# Altium PCB DifferentialPair.PCBDOC
Units mil, origin at the board's own origin, x right, y up, seen from the top; angles counter-clockwise.
Board outline 6000 x 4000 mil, 4 copper layers (Component Side, Ground Plane, Power Plane, Solder Side); 6 components, 7 nets, 424 pads, 0 vias.
Unrouted connection lines stored in the file: 101.
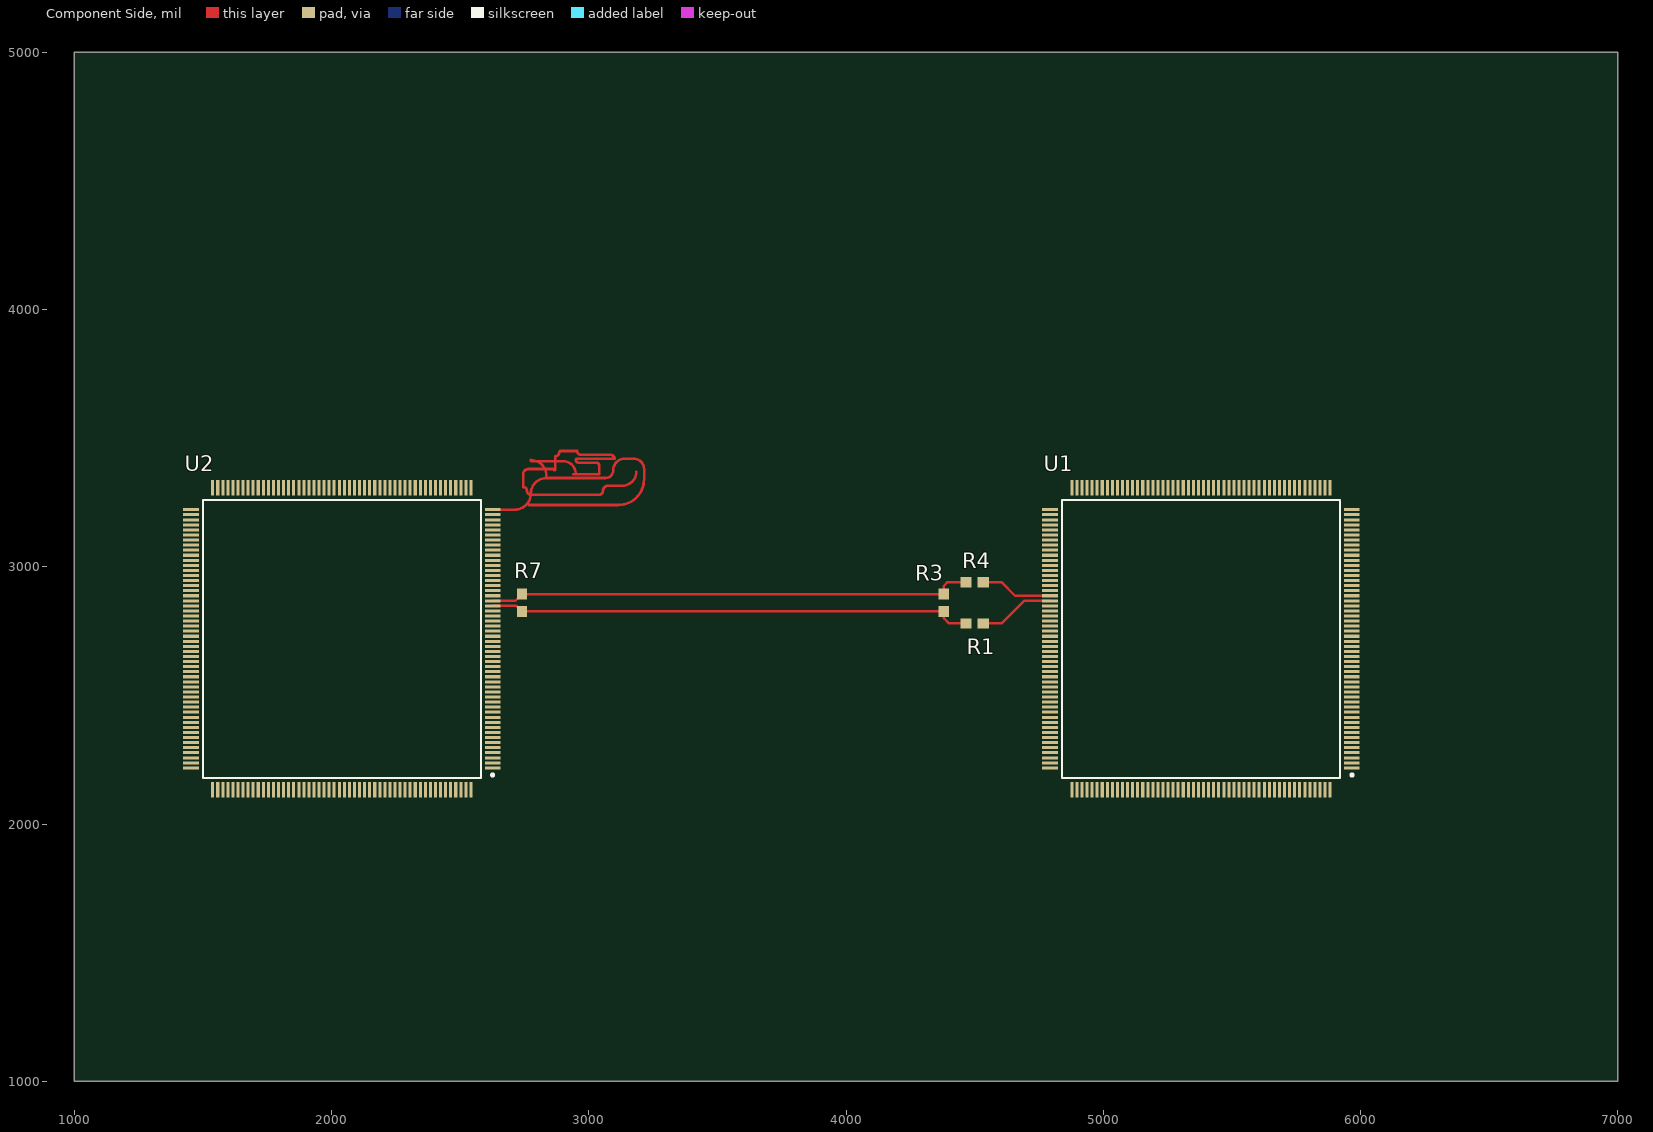
[diagram p0: Component Side view]
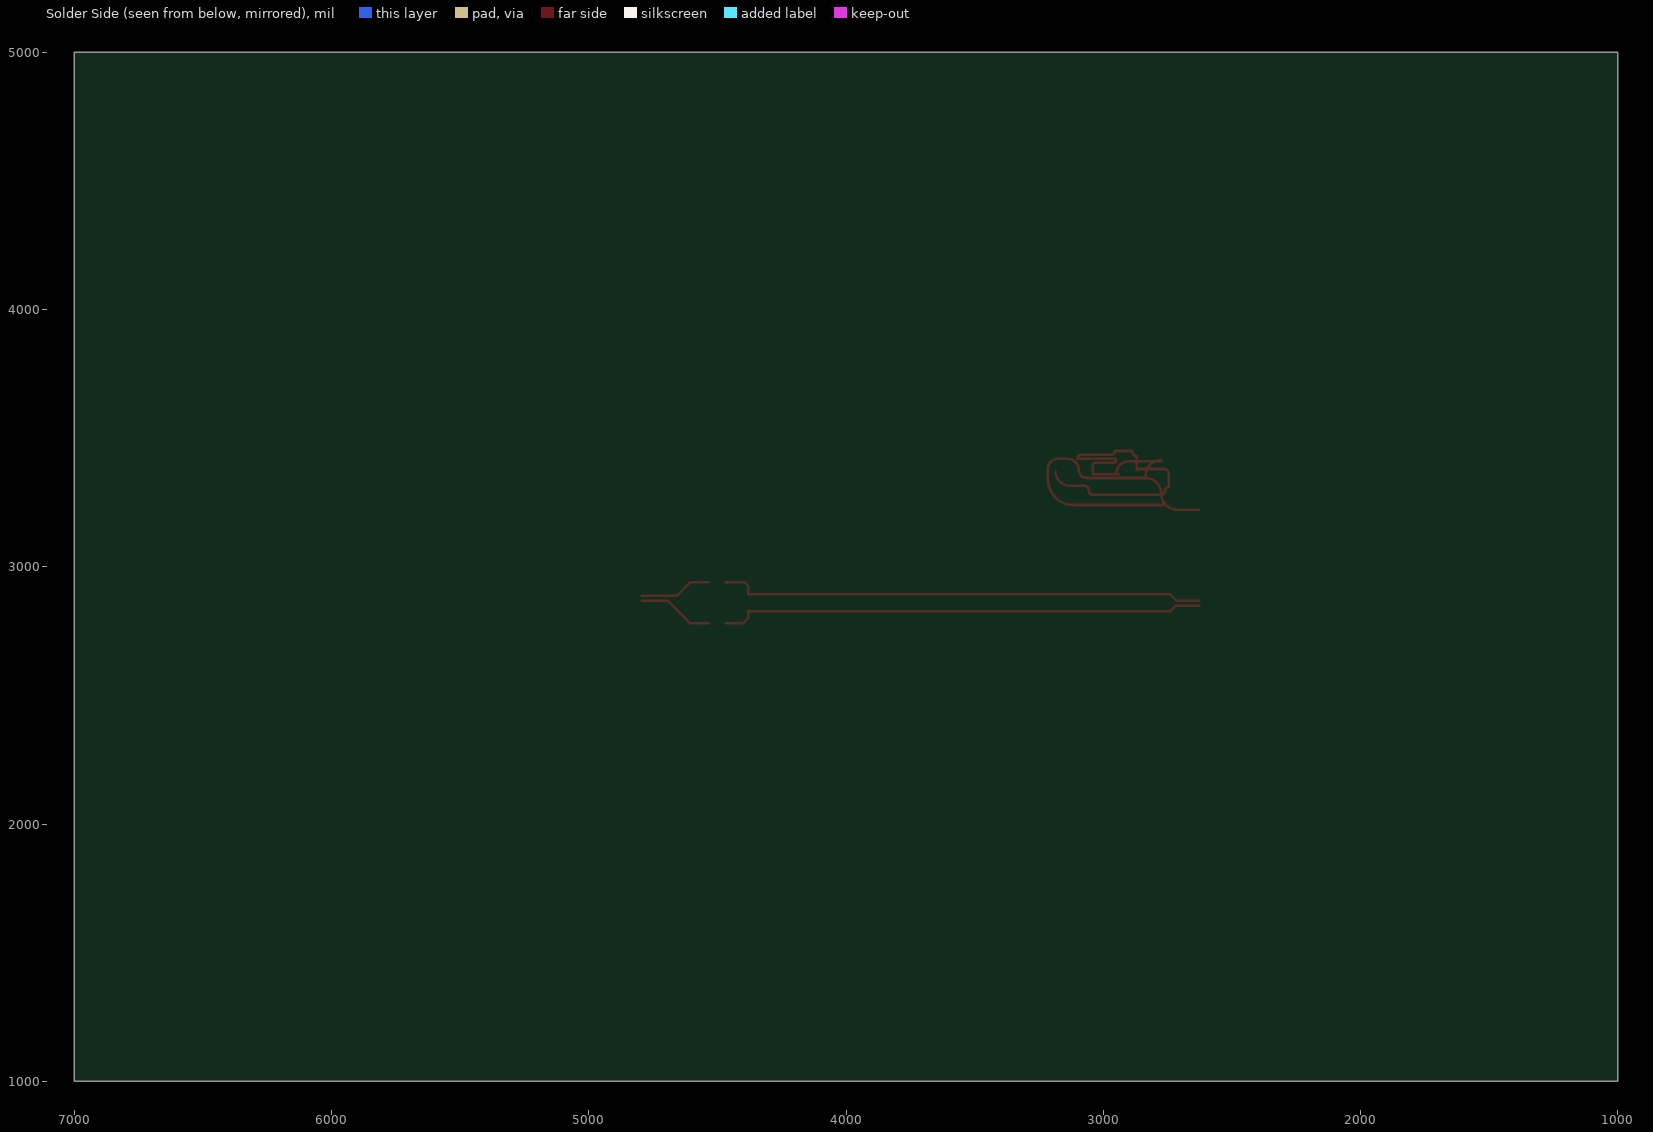
[diagram p1: Solder Side view, seen from below]
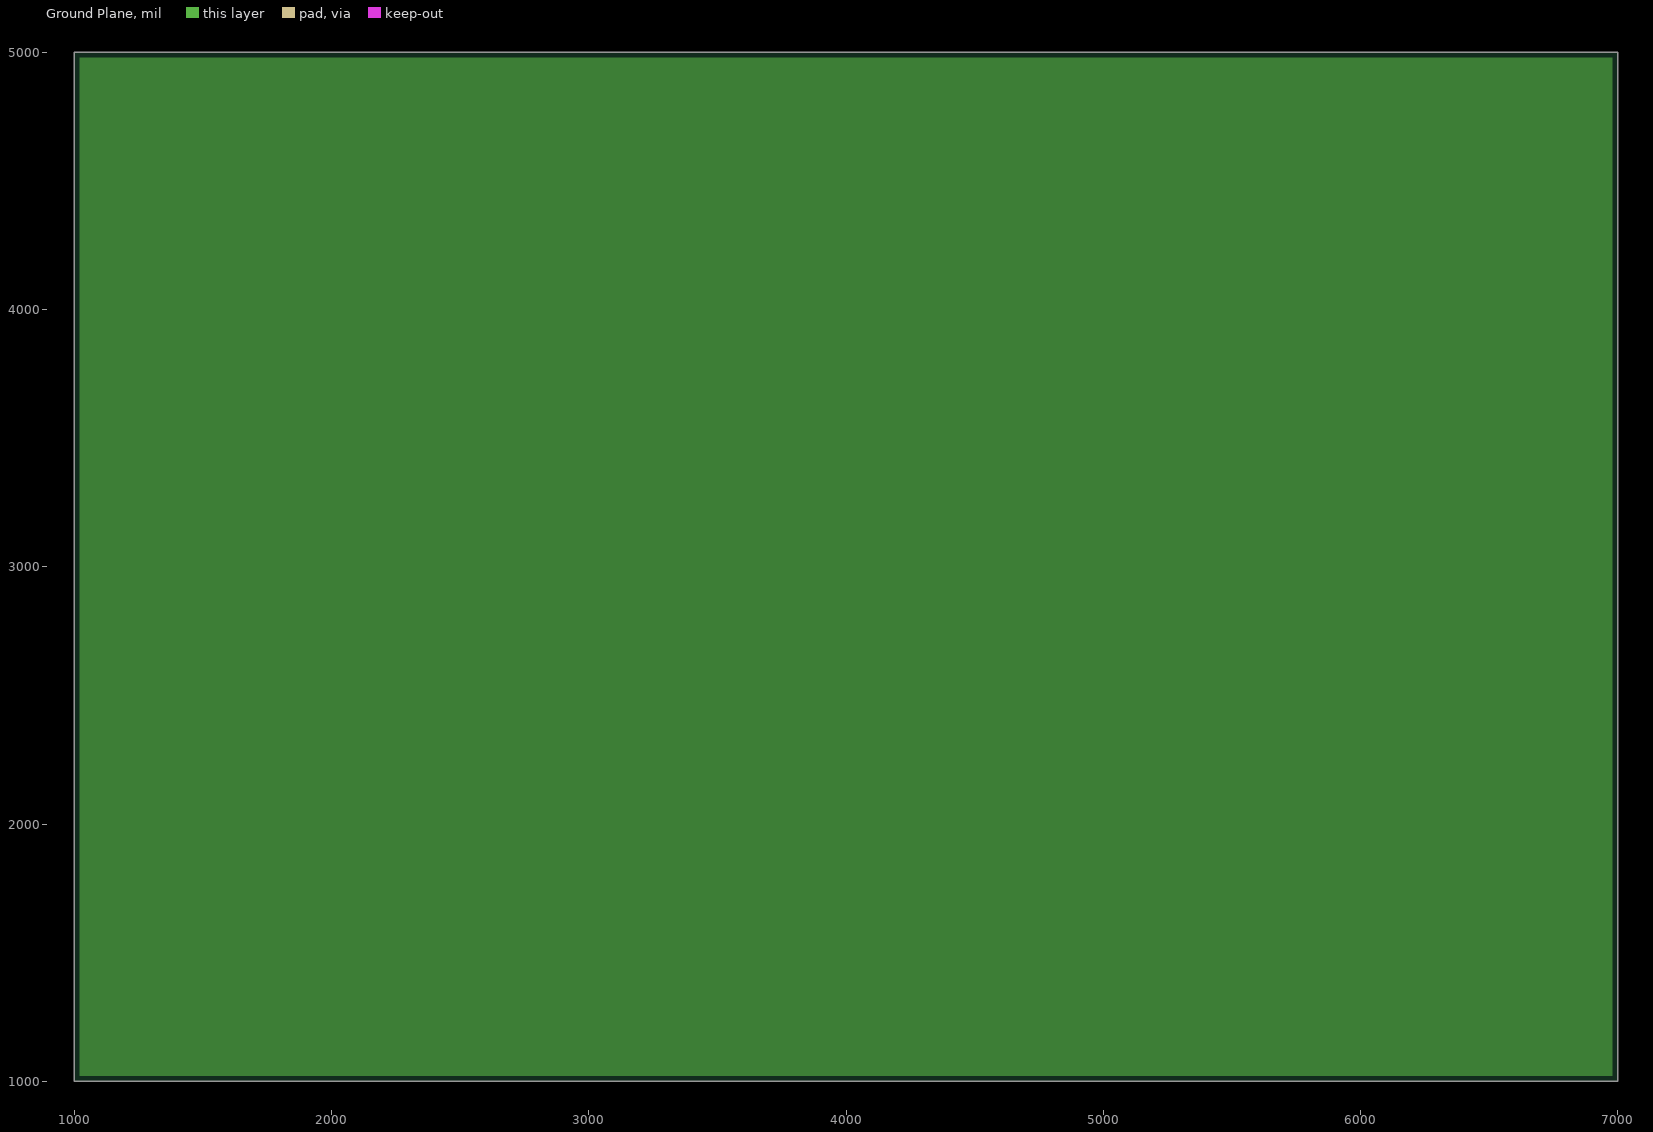
[diagram p2: Ground Plane, clearances drawn from the general rule]
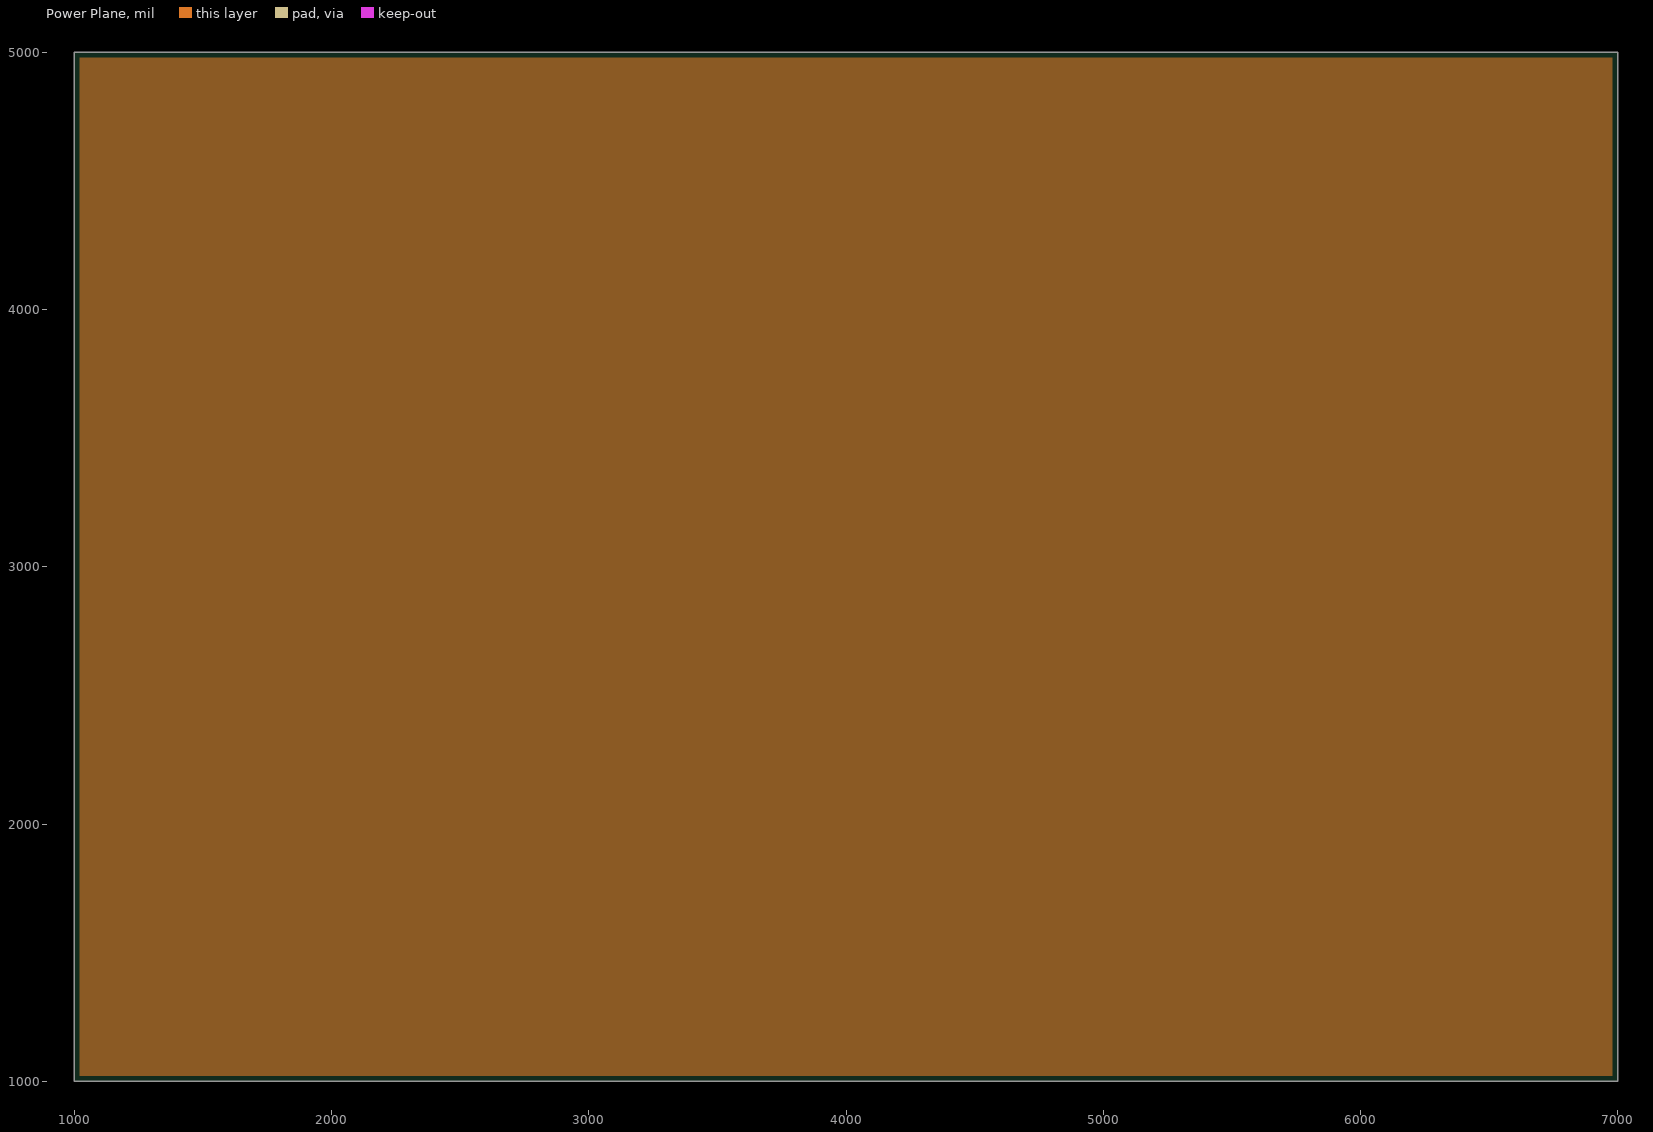
[diagram p3: Power Plane, clearances drawn from the general rule]

## Layer stack, top to bottom
Top Solder: solder mask 0.4, Solder Resist, Dk 3.5
Component Side: signal copper 1.4
Dielectric1: core 12.6, FR-4, Dk 4.8
Ground Plane: plane copper 1.4, net GND
Dielectric2: prepreg 12.6, FR-4, Dk 4.8
Power Plane: plane copper 1.4, net VCC
Dielectric3: core 12.6, FR-4, Dk 4.8
Solder Side: signal copper 1.4
Bottom Solder: solder mask 0.4, Solder Resist, Dk 3.5

## Board outline
1000,1000 7000,1000 7000,5000 1000,5000

## Design rules (kind name [scope] priority, off if disabled: settings)
Clearance [All] p1: gap=5 ignorepadtopadclearanceinfootprint=FALSE except(0: Arc-Hole Track-Hole SMDPad-Hole THPad-Hole Via-Hole Fill-Hole Poly-Hole Region-Hole Text-Hole)
DiffPairsRouting [All] p1: maxlimit=10 minlimit=10 mostfreqgap=10 toplayer_minwidth=15 toplayer_maxwidth=15 toplayer_prefwidth=15 bottomlayer_minwidth=15 bottomlayer_maxwidth=15 bottomlayer_prefwidth=15 maxuncoupledlength=500
FabricationTestPointUsage TestPointUsage [All] p1: valid=0 allowmultiple=FALSE
FabricationTestpoint Testpoint [All] p1: side=3 testpointundercomponent=TRUE minsize=40 maxsize=100 preferedsize=60 minholesize=0 maxholesize=40 preferedholesize=32 testpointgrid=1 allowsidetop=TRUE allowsidebottom=TRUE usegrid=TRUE gridtolerance=0.01
PlaneClearance [All] p1: clearance=20
PlaneConnect [All] p1: planeconnectstyle=Relief reliefexpansion=20 reliefentries=4 reliefconductorwidth=10 reliefairgap=10
PolygonConnect [All] p1: connectstyle=Relief reliefconductorwidth=10 reliefentries=4 polygonreliefangle="90 Angle" airgapwidth=10
RoomDefinition DifferentialPair [InComponentClass('DifferentialPair')] p1: confinementstyle=ConfineIn formatcopy=TRUE lockcomponents=FALSE outline 1250,1850 6245,1850 6245,3600 1250,3600
RoutingVias [All] p1: holewidth=28 width=50 viastyle="Through Hole" minholewidth=28 minwidth=50 maxholewidth=28 maxwidth=50
SignalStimulus SignalStimulus_N [InNet('DRV_N')] p1: kind=1 level=1 starttime=10.00n stoptime=60.00n periodtime=100.0n
SignalStimulus SignalStimulus_POS [InNet('DRV_P')] p2: kind=1 level=0 starttime=10.00n stoptime=60.00n periodtime=100.0n
SilkToSolderMaskClearance SilkscreenOverComponentPads [IsPad] p1: minsilkscreentomaskgap=10 clearancetoexposedcopper=TRUE
SolderMaskExpansion [All] p1: expansion=4
SupplyNets SupplyNets_VCC2 [InNet('VCC1V8')] p1: voltage=1.800
SupplyNets SupplyNets_VCC1 [InNet('VCC')] p2: voltage=3.300
SupplyNets SupplyNets_GND [InNet('GND')] p3: voltage=0.000
Width [All] p1: maxlimit=10 minlimit=10 preferedwidth=10
24 further rules are at their usual default settings.

## Classes and differential pairs
differential pair REC: +REC_P -REC_N
differential pair DRV: +DRV_P -DRV_N

## Components (designator, comment, footprint, x,y, rotation, side; value= is the part's Value field where it differs from the comment)
R1 "Res3" J1-0603 4500,2780 r180 top
R3 "Res3" J1-0603 4380,2860 r270 top
R4 "Res3" J1-0603 4500,2940 r0 top
R7 "Res3" J1-0603 2740,2860 r90 top
U1 "XC2S200E-6PQ208C" PQ208 5380,2720 r180 top
U2 "XC2S200E-6PQ208C" PQ208 2040,2720 r180 top

## Footprints (in the part's own frame and the unit in brackets; to place one, negate y for a bottom-side part, rotate by r counter-clockwise, add the part's x,y. Pads: shape width x height; smd on the part's side, far side on the other; paste and mask are expansions set on the pad)
J1-0603 [mm] "Chip Resistor; Body 1.6 x 0.8 mm (LxW typ)"
  rect 1.1x1 smd: 1(-0.85,0) 2(0.85,0)
PQ208 [mm] "208-Pin Plastic Quad Flat Pack (PQ208)"
  rect 1.55x0.3 smd: 1(-14.9,12.75) 2(-14.9,12.25) 3(-14.9,11.75) 4(-14.9,11.25) 5(-14.9,10.75) 6(-14.9,10.25) 7(-14.9,9.75) 8(-14.9,9.25) 9(-14.9,8.75) 10(-14.9,8.25) 11(-14.9,7.75) 12(-14.9,7.25) 13(-14.9,6.75) 14(-14.9,6.25) 15(-14.9,5.75) 16(-14.9,5.25) 17(-14.9,4.75) 18(-14.9,4.25) 19(-14.9,3.75) 20(-14.9,3.25) 21(-14.9,2.75) 22(-14.9,2.25) 23(-14.9,1.75) 24(-14.9,1.25) 25(-14.9,0.75) 26(-14.9,0.25) 27(-14.9,-0.25) 28(-14.9,-0.75) 29(-14.9,-1.25) 30(-14.9,-1.75) 31(-14.9,-2.25) 32(-14.9,-2.75) 33(-14.9,-3.25) 34(-14.9,-3.75) 35(-14.9,-4.25) 36(-14.9,-4.75) 37(-14.9,-5.25) 38(-14.9,-5.75) 39(-14.9,-6.25) 40(-14.9,-6.75) 41(-14.9,-7.25) 42(-14.9,-7.75) 43(-14.9,-8.25) 44(-14.9,-8.75) 45(-14.9,-9.25) 46(-14.9,-9.75) 47(-14.9,-10.25) 48(-14.9,-10.75) 49(-14.9,-11.25) 50(-14.9,-11.75) 51(-14.9,-12.25) 52(-14.9,-12.75) 105(14.9,-12.75) 106(14.9,-12.25) 107(14.9,-11.75) 108(14.9,-11.25) 109(14.9,-10.75) 110(14.9,-10.25) 111(14.9,-9.75) 112(14.9,-9.25) 113(14.9,-8.75) 114(14.9,-8.25) 115(14.9,-7.75) 116(14.9,-7.25) 117(14.9,-6.75) 118(14.9,-6.25) 119(14.9,-5.75) 120(14.9,-5.25) 121(14.9,-4.75) 122(14.9,-4.25) 123(14.9,-3.75) 124(14.9,-3.25) 125(14.9,-2.75) 126(14.9,-2.25) 127(14.9,-1.75) 128(14.9,-1.25) 129(14.9,-0.75) 130(14.9,-0.25) 131(14.9,0.25) 132(14.9,0.75) 133(14.9,1.25) 134(14.9,1.75) 135(14.9,2.25) 136(14.9,2.75) 137(14.9,3.25) 138(14.9,3.75) 139(14.9,4.25) 140(14.9,4.75) 141(14.9,5.25) 142(14.9,5.75) 143(14.9,6.25) 144(14.9,6.75) 145(14.9,7.25) 146(14.9,7.75) 147(14.9,8.25) 148(14.9,8.75) 149(14.9,9.25) 150(14.9,9.75) 151(14.9,10.25) 152(14.9,10.75) 153(14.9,11.25) 154(14.9,11.75) 155(14.9,12.25) 156(14.9,12.75)
  rect 0.3x1.55 smd: 53(-12.75,-14.9) 54(-12.25,-14.9) 55(-11.75,-14.9) 56(-11.25,-14.9) 57(-10.75,-14.9) 58(-10.25,-14.9) 59(-9.75,-14.9) 60(-9.25,-14.9) 61(-8.75,-14.9) 62(-8.25,-14.9) 63(-7.75,-14.9) 64(-7.25,-14.9) 65(-6.75,-14.9) 66(-6.25,-14.9) 67(-5.75,-14.9) 68(-5.25,-14.9) 69(-4.75,-14.9) 70(-4.25,-14.9) 71(-3.75,-14.9) 72(-3.25,-14.9) 73(-2.75,-14.9) 74(-2.25,-14.9) 75(-1.75,-14.9) 76(-1.25,-14.9) 77(-0.75,-14.9) 78(-0.25,-14.9) 79(0.25,-14.9) 80(0.75,-14.9) 81(1.25,-14.9) 82(1.75,-14.9) 83(2.25,-14.9) 84(2.75,-14.9) 85(3.25,-14.9) 86(3.75,-14.9) 87(4.25,-14.9) 88(4.75,-14.9) 89(5.25,-14.9) 90(5.75,-14.9) 91(6.25,-14.9) 92(6.75,-14.9) 93(7.25,-14.9) 94(7.75,-14.9) 95(8.25,-14.9) 96(8.75,-14.9) 97(9.25,-14.9) 98(9.75,-14.9) 99(10.25,-14.9) 100(10.75,-14.9) 101(11.25,-14.9) 102(11.75,-14.9) 103(12.25,-14.9) 104(12.75,-14.9) 157(12.75,14.9) 158(12.25,14.9) 159(11.75,14.9) 160(11.25,14.9) 161(10.75,14.9) 162(10.25,14.9) 163(9.75,14.9) 164(9.25,14.9) 165(8.75,14.9) 166(8.25,14.9) 167(7.75,14.9) 168(7.25,14.9) 169(6.75,14.9) 170(6.25,14.9) 171(5.75,14.9) 172(5.25,14.9) 173(4.75,14.9) 174(4.25,14.9) 175(3.75,14.9) 176(3.25,14.9) 177(2.75,14.9) 178(2.25,14.9) 179(1.75,14.9) 180(1.25,14.9) 181(0.75,14.9) 182(0.25,14.9) 183(-0.25,14.9) 184(-0.75,14.9) 185(-1.25,14.9) 186(-1.75,14.9) 187(-2.25,14.9) 188(-2.75,14.9) 189(-3.25,14.9) 190(-3.75,14.9) 191(-4.25,14.9) 192(-4.75,14.9) 193(-5.25,14.9) 194(-5.75,14.9) 195(-6.25,14.9) 196(-6.75,14.9) 197(-7.25,14.9) 198(-7.75,14.9) 199(-8.25,14.9) 200(-8.75,14.9) 201(-9.25,14.9) 202(-9.75,14.9) 203(-10.25,14.9) 204(-10.75,14.9) 205(-11.25,14.9) 206(-11.75,14.9) 207(-12.25,14.9) 208(-12.75,14.9)
  silkscreen extent -15.03,-13.72 13.72,13.72

## Part data
R1 R3 R4 R7: "Resistor"
U1 U2: "Spartan-IIE 1.8V FPGA, 208-Pin PQFP, Standard Performance, Commercial Grade"

## Nets (pads, with @x,y where several pads share a name; then routed paths per layer and width w, separated by ;. In a path a pad name is that pad's centre, name@x,y a point inside that pad or via, vN(x,y) a via of type N, cw(c..) or ccw(c..) an arc to the next point about the centre after c; other vN are vias at no path point)
DRV_N: R4.2 U1.122 | length 281.7
  Component Side w10: R4.2 4605,2940 4657.68,2887.32 U1.122
DRV_P: R1.1 U1.123 | length 296.2
  Component Side w10: R1.1 4605,2780 4692.64,2867.64 U1.123
GND: U1.1 U1.12 U1.19 U1.25 U1.32 U1.39 U1.51 U1.65 U1.72 U1.79 U1.85 U1.92 U1.103 U1.117 U1.124 U1.131 U1.137 U1.144 U1.158 U1.170 U1.177 U1.183 U1.190 U1.197 U2.1 U2.12 U2.19 U2.25 U2.32 U2.39 U2.51 U2.65 U2.72 U2.79 U2.85 U2.92 U2.103 U2.117 U2.124 U2.131 U2.137 U2.144 U2.158 U2.170 U2.177 U2.183 U2.190 U2.197
REC_N: R3.1 R4.1 R7.2 U2.34 | length 1888.4
  Component Side w10: U2.34 2714.17,2867.64 R7.2 R3.1 4380,2925 4395,2940 R4.1
REC_P: R1.2 R3.2 R7.1 U2.33 | length 1883.6
  Component Side w10: U2.33 2718.58,2847.95 R7.1 R3.2 4380,2800 4400,2780 R1.2
VCC: U1.13 U1.26 U1.38 U1.53 U1.66 U1.78 U1.91 U1.105 U1.118 U1.130 U1.143 U1.156 U1.171 U1.184 U1.196 U1.208 U2.13 U2.26 U2.38 U2.53 U2.66 U2.78 U2.91 U2.105 U2.118 U2.130 U2.143 U2.156 U2.171 U2.184 U2.196 U2.208
VCC1V8: U1.14 U1.28 U1.37 U1.67 U1.76 U1.90 U1.119 U1.128 U1.142 U1.172 U1.186 U1.195 U2.14 U2.28 U2.37 U2.67 U2.76 U2.90 U2.119 U2.128 U2.142 U2.172 U2.186 U2.195
pads on no net: U1.2 U1.3 U1.4 U1.5 U1.6 U1.7 U1.8 U1.9 U1.10 U1.11 U1.15 U1.16 U1.17 U1.18 U1.20 U1.21 U1.22 U1.23 U1.24 U1.27 U1.29 U1.30 U1.31 U1.33 U1.34 U1.35 U1.36 U1.40 U1.41 U1.42 U1.43 U1.44 U1.45 U1.46 U1.47 U1.48 U1.49 U1.50 U1.52 U1.54 U1.55 U1.56 U1.57 U1.58 U1.59 U1.60 U1.61 U1.62 U1.63 U1.64 U1.68 U1.69 U1.70 U1.71 U1.73 U1.74 U1.75 U1.77 U1.80 U1.81 U1.82 U1.83 U1.84 U1.86 U1.87 U1.88 U1.89 U1.93 U1.94 U1.95 U1.96 U1.97 U1.98 U1.99 U1.100 U1.101 U1.102 U1.104 U1.106 U1.107 U1.108 U1.109 U1.110 U1.111 U1.112 U1.113 U1.114 U1.115 U1.116 U1.120 U1.121 U1.125 U1.126 U1.127 U1.129 U1.132 U1.133 U1.134 U1.135 U1.136 U1.138 U1.139 U1.140 U1.141 U1.145 U1.146 U1.147 U1.148 U1.149 U1.150 U1.151 U1.152 U1.153 U1.154 U1.155 U1.157 U1.159 U1.160 U1.161 U1.162 U1.163 U1.164 U1.165 U1.166 U1.167 U1.168 U1.169 U1.173 U1.174 U1.175 U1.176 U1.178 U1.179 U1.180 U1.181 U1.182 U1.185 U1.187 U1.188 U1.189 U1.191 U1.192 U1.193 U1.194 U1.198 U1.199 U1.200 U1.201 U1.202 U1.203 U1.204 U1.205 U1.206 U1.207 U2.2 U2.3 U2.4 U2.5 U2.6 U2.7 U2.8 U2.9 U2.10 U2.11 U2.15 U2.16 U2.17 U2.18 U2.20 U2.21 U2.22 U2.23 U2.24 U2.27 U2.29 U2.30 U2.31 U2.35 U2.36 U2.40 U2.41 U2.42 U2.43 U2.44 U2.45 U2.46 U2.47 U2.48 U2.49 U2.50 U2.52 U2.54 U2.55 U2.56 U2.57 U2.58 U2.59 U2.60 U2.61 U2.62 U2.63 U2.64 U2.68 U2.69 U2.70 U2.71 U2.73 U2.74 U2.75 U2.77 U2.80 U2.81 U2.82 U2.83 U2.84 U2.86 U2.87 U2.88 U2.89 U2.93 U2.94 U2.95 U2.96 U2.97 U2.98 U2.99 U2.100 U2.101 U2.102 U2.104 U2.106 U2.107 U2.108 U2.109 U2.110 U2.111 U2.112 U2.113 U2.114 U2.115 U2.116 U2.120 U2.121 U2.122 U2.123 U2.125 U2.126 U2.127 U2.129 U2.132 U2.133 U2.134 U2.135 U2.136 U2.138 U2.139 U2.140 U2.141 U2.145 U2.146 U2.147 U2.148 U2.149 U2.150 U2.151 U2.152 U2.153 U2.154 U2.155 U2.157 U2.159 U2.160 U2.161 U2.162 U2.163 U2.164 U2.165 U2.166 U2.167 U2.168 U2.169 U2.173 U2.174 U2.175 U2.176 U2.178 U2.179 U2.180 U2.181 U2.182 U2.185 U2.187 U2.188 U2.189 U2.191 U2.192 U2.193 U2.194 U2.198 U2.199 U2.200 U2.201 U2.202 U2.203 U2.204 U2.205 U2.206 U2.207
copper on no net: | length 3001
  Component Side w10: 2626.61,3221.97 2711.97,3221.97 ccw(c2711.97,3285) 2775,3285 cw(c2835,3285) 2835,3345 ; 2760,3245 2765,3245 ccw(c2770,3245) 2770,3240 3115,3240 ccw(c3115,3340) 3215,3340 3215,3380 ccw(c3175,3380) 3175,3420 3140,3420 ccw(c3140,3375) 3095,3375 cw(c3065,3375) 3065,3345 3020,3345 2835,3345 ; 2865,3375 ccw(c2865,3380) 2870,3380 ; 3185,3370 cw(c3130,3370) 3130,3315 3075,3315 ccw(c3075,3295) 3055,3295 cw(c3040,3295) 3040,3280 2775,3280 cw(c2775,3295.29) 2759.71,3295.29 ccw(c2745,3295.29) 2745,3310 2745,3360 cw(c2765,3360) 2765,3380 2870,3380 ; 2835,3345 2835,3355 ccw(c2775,3355) 2775,3415 ccw(c2780,3415) 2780,3410 2900,3410 cw(c2900,3360) 2950,3360 2940,3360 3040,3360 3040,3395 ccw(c3030,3395) 3030,3405 2960,3405 cw(c2960,3415) 2950,3415 cw(c2955,3415) 2955,3420 3100.31,3420 ccw(c3085.31,3420) 3085.31,3435 2970,3435 cw(c2970,3450) 2955,3450 2890,3450 ccw(c2890,3445) 2885,3445 cw(c2870,3445) 2870,3430 2870,3380

## Polygon pours and split planes (outlines as drawn)
GND on Ground Plane (split plane): 6979.9,1020.1 1020.1,1020.1 1020.1,4979.9 6979.9,4979.9
VCC on Power Plane (split plane): 6979.9,1020.1 1020.1,1020.1 1020.1,4979.9 6979.9,4979.9